# EAGLE board hermesONE v2.0 (EAGLE 9.4.2)
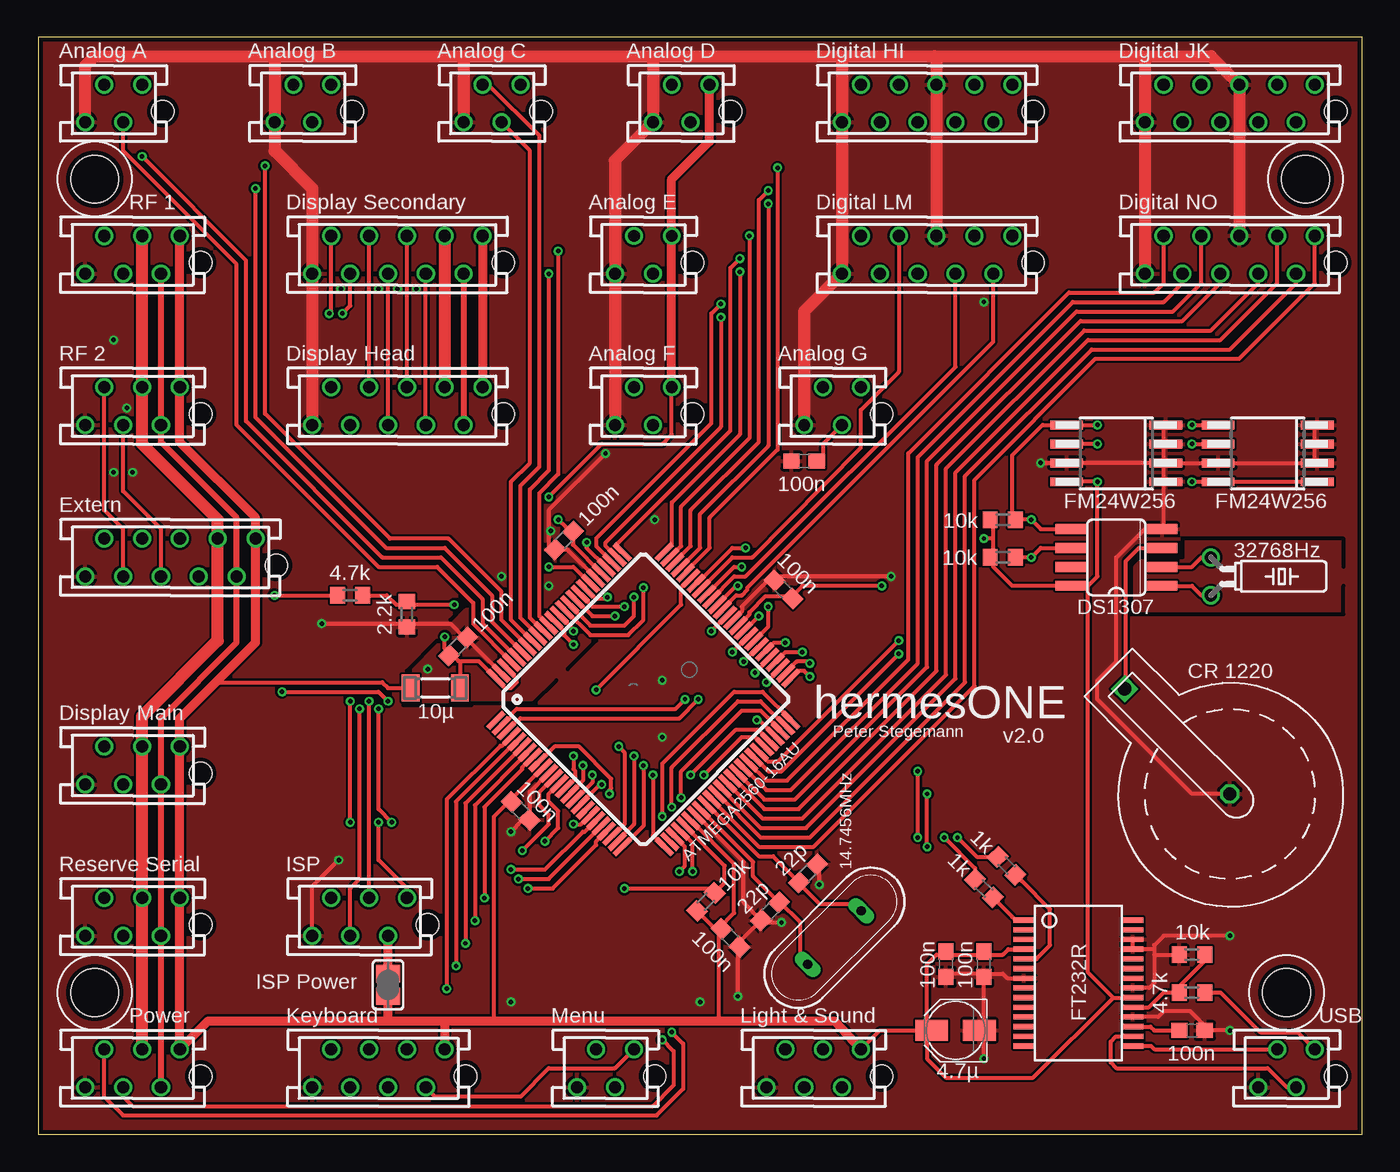
[diagram p0: board, top side]
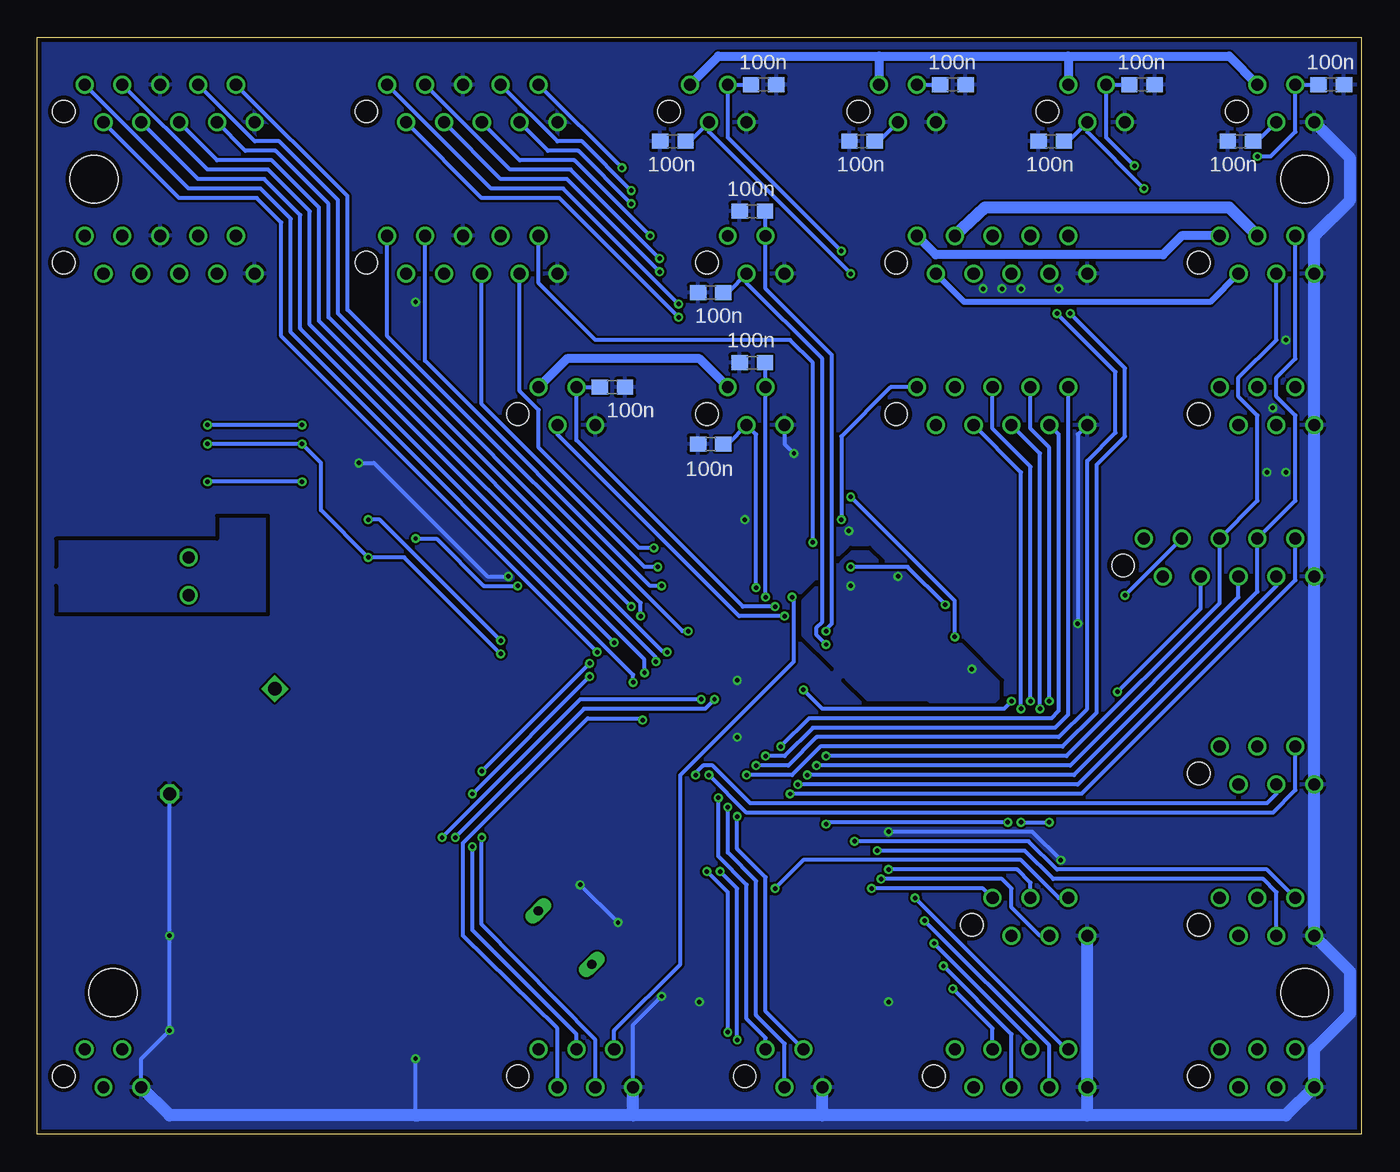
[diagram p1: board, bottom side, seen from below]

Size 88.9 x 73.66 mm. Coordinates in mm from the lower left corner, seen from the top.
Outline: 0,0 88.9,0 88.9,73.66 0,73.66 0,0
Copper layers (1*16): Top 0.035mm / dielectric 1.5mm / Bottom 0.035mm
Design rules "PCB-POOL Standard *": minimum track width 0.15mm, minimum drill 0.3mm, track to track 0.15mm, track to pad 0.15mm, pad to pad 0.15mm, via to via 0.15mm, smd to smd 0.15mm, copper to edge 0.3mm, drill to drill 0.2mm, minimum pad ring 0.2mm, minimum via ring 0.15mm, stop-mask expansion 0.075mm, vias tented up to drill 0mil, thermal gap 0.2mm
Net classes: 0 default: width 0.254 mm
Holes 3.2 mm at 83.82,9.53 3.81,9.53 3.81,64.14 85.09,64.14
tRestrict: 16 lines
bRestrict: 20 lines

## Footprints (pad centres in the part's own frame; a part is rotated, then mirrored left to right if it is on the bottom)
C0603 = smd 1.1 x 1: 1 -0.85,0; 2 0.85,0
PANASONIC_B = smd 2.2 x 1.4: + 1.6,0; - -1.6,0
KZH12THM = drill 0.9 square: + 9.982,0 | drill 0.9 octagon: - 0,0
TQFP100 = smd 1.5 x 0.35: 1 -8,6; 2 -8,5.5; 3 -8,5; 4 -8,4.5; 5 -8,4; 6 -8,3.5; 7 -8,3; 8 -8,2.5; 9 -8,2; 10 -8,1.5; 11 -8,1; 12 -8,0.5; 13 -8,0; 14 -8,-0.5; 15 -8,-1; 16 -8,-1.5; 17 -8,-2; 18 -8,-2.5; 19 -8,-3; 20 -8,-3.5; 21 -8,-4; 22 -8,-4.5; 23 -8,-5; 24 -8,-5.5; 25 -8,-6; 51 8,-6; 52 8,-5.5; 53 8,-5; 54 8,-4.5; 55 8,-4; 56 8,-3.5; 57 8,-3; 58 8,-2.5; 59 8,-2; 60 8,-1.5; 61 8,-1; 62 8,-0.5; 63 8,0; 64 8,0.5; 65 8,1; 66 8,1.5; 67 8,2; 68 8,2.5; 69 8,3; 70 8,3.5; 71 8,4; 72 8,4.5; 73 8,5; 74 8,5.5; 75 8,6 | smd 0.35 x 1.5: 26 -6,-8; 27 -5.5,-8; 28 -5,-8; 29 -4.5,-8; 30 -4,-8; 31 -3.5,-8; 32 -3,-8; 33 -2.5,-8; 34 -2,-8; 35 -1.5,-8; 36 -1,-8; 37 -0.5,-8; 38 0,-8; 39 0.5,-8; 40 1,-8; 41 1.5,-8; 42 2,-8; 43 2.5,-8; 44 3,-8; 45 3.5,-8; 46 4,-8; 47 4.5,-8; 48 5,-8; 49 5.5,-8; 50 6,-8; 76 6,8; 77 5.5,8; 78 5,8; 79 4.5,8; 80 4,8; 81 3.5,8; 82 3,8; 83 2.5,8; 84 2,8; 85 1.5,8; 86 1,8; 87 0.5,8; 88 0,8; 89 -0.5,8; 90 -1,8; 91 -1.5,8; 92 -2,8; 93 -2.5,8; 94 -3,8; 95 -3.5,8; 96 -4,8; 97 -4.5,8; 98 -5,8; 99 -5.5,8; 100 -6,8
SOIC-8 = smd 2.032 x 0.66: 1 -3.073,1.27; 2 -3.073,0; 3 -3.073,-1.27; 4 -3.073,-2.54; 5 3.073,-2.54; 6 3.073,-1.27; 7 3.073,0; 8 3.073,1.27
SO-08M = smd 0.6 x 2.2: 1 -1.905,-3.33; 2 -0.635,-3.33; 3 0.635,-3.33; 4 1.905,-3.33; 5 1.905,3.33; 6 0.635,3.33; 7 -0.635,3.33; 8 -1.905,3.33
SM-1206 = smd 1.2 x 1.8: 1 -1.65,0; 2 1.65,0
MT-4 = drill 0.8: 1 1.905,1.27; 2 0.635,-1.27; 3 -0.635,1.27; 4 -1.905,-1.27 | hole 1.5: 3.302,-0.533
MT-10 = drill 0.813: 1 5.715,1.27; 2 4.445,-1.27; 3 3.175,1.27; 4 1.905,-1.27; 5 0.635,1.27; 6 -0.635,-1.27; 7 -1.905,1.27; 8 -3.175,-1.27; 9 -4.445,1.27; 10 -5.715,-1.27 | hole 1.5: 7.112,-0.533
MT-6 = drill 0.813: 1 3.175,1.27; 2 1.905,-1.27; 3 0.635,1.27; 4 -0.635,-1.27; 5 -1.905,1.27; 6 -3.175,-1.27 | hole 1.5: 4.572,-0.533
MT-8 = drill 0.813: 1 4.445,1.27; 2 3.175,-1.27; 3 1.905,1.27; 4 0.635,-1.27; 5 -0.635,1.27; 6 -1.905,-1.27; 7 -3.175,1.27; 8 -4.445,-1.27 | hole 1.5: 5.842,-0.533
QS = drill 0.61 long: 1 -2.54,0; 2 2.54,0
TC26H = drill 0.813: 1 -1.27,0; 2 1.27,0
R0603 = smd 1 x 1.1: 1 -0.85,0; 2 0.85,0
SJ = smd 1.168 x 1.6: 1 -0.762,0; 2 0.762,0
SSOP28DB = smd 0.348 x 1.397: 1 -4.225,-3.656; 2 -3.575,-3.656; 3 -2.925,-3.656; 4 -2.275,-3.656; 5 -1.625,-3.656; 6 -0.975,-3.656; 7 -0.325,-3.656; 8 0.325,-3.656; 9 0.975,-3.656; 10 1.625,-3.656; 11 2.275,-3.656; 12 2.925,-3.656; 13 3.575,-3.656; 14 4.225,-3.656; 15 4.225,3.656; 16 3.575,3.656; 17 2.925,3.656; 18 2.275,3.656; 19 1.625,3.656; 20 0.975,3.656; 21 0.325,3.656; 22 -0.325,3.656; 23 -0.975,3.656; 24 -1.625,3.656; 25 -2.275,3.656; 26 -2.925,3.656; 27 -3.575,3.656; 28 -4.225,3.656

## Placement (x,y rotation side)
C1  22p  [C0603]  51.69,17.53 45 top
C2  22p  [C0603]  49.15,14.99 225 top
C3  100n  [C0603]  60.96,11.43 90 top
C4  100n  [C0603]  63.5,11.43 90 top
C5  100n  [C0603]  28.19,32.77 45 top
C6  100n  [C0603]  35.31,39.88 225 top
C7  100n  [C0603]  50.04,36.58 135 top
C8  100n  [C0603]  46.48,13.21 315 top
C9  100n  [C0603]  32.38,21.72 315 top
C10  100n  [C0603]  77.47,6.99 180 top
C11  4.7µ  [PANASONIC_B]  61.59,6.99 180 top
C12  100n  [C0603]  8.13,66.67 180 bottom
C13  100n  [C0603]  2.03,70.48 0 bottom
C14  100n  [C0603]  20.83,66.67 180 bottom
C15  100n  [C0603]  14.73,70.48 0 bottom
C16  100n  [C0603]  33.53,66.67 180 bottom
C17  100n  [C0603]  27.43,70.48 0 bottom
C18  100n  [C0603]  46.23,66.67 180 bottom
C19  100n  [C0603]  40.13,70.48 0 bottom
C20  100n  [C0603]  43.69,56.52 180 bottom
C21  100n  [C0603]  40.89,61.98 180 bottom
C22  100n  [C0603]  43.69,46.35 180 bottom
C23  100n  [C0603]  40.89,51.82 180 bottom
C24  100n  [C0603]  51.44,45.21 180 top
C25  100n  [C0603]  50.29,50.16 0 bottom
G1  CR 1220  [KZH12THM]  80.01,22.86 135 top
IC1  ATMEGA2560-16AU  [TQFP100]  40.64,29.21 45 top
IC3  DS1307  [SOIC-8]  72.39,38.1 180 top
IC4  FM24W256  [SO-08M]  72.39,45.72 90 top
IC5  FM24W256  [SO-08M]  82.55,45.72 90 top
L1  10µ  [SM-1206]  26.67,29.97 0 top
M1  Analog A  [MT-4]  5.08,69.22 0 top
M2  Analog B  [MT-4]  17.78,69.22 0 top
M3  Analog C  [MT-4]  30.48,69.22 0 top
M4  Analog D  [MT-4]  43.18,69.22 0 top
M5  Analog E  [MT-4]  40.64,59.05 0 top
M6  Analog F  [MT-4]  40.64,48.9 0 top
M7  Analog G  [MT-4]  53.34,48.9 0 top
M8  Digital HI  [MT-10]  59.69,69.22 0 top
M9  Digital JK  [MT-10]  80.01,69.22 0 top
M10  Digital LM  [MT-10]  59.69,59.05 0 top
M11  Digital NO  [MT-10]  80.01,59.05 0 top
M20  Power  [MT-6]  6.35,4.45 0 top
M21  ISP  [MT-6]  21.59,14.61 0 top
M23  USB  [MT-4]  83.82,4.45 0 top
M30  RF 1  [MT-6]  6.35,59.05 0 top
M31  RF 2  [MT-6]  6.35,48.9 0 top
M32  Extern  [MT-10]  8.89,38.73 0 top
M40  Display Head  [MT-10]  24.13,48.9 0 top
M41  Display Secondary  [MT-10]  24.13,59.05 0 top
M42  Display Main  [MT-6]  6.35,24.77 0 top
M43  Reserve Serial  [MT-6]  6.35,14.61 0 top
M50  Light & Sound  [MT-6]  52.07,4.45 0 top
M51  Menu  [MT-4]  38.1,4.45 0 top
M52  Keyboard  [MT-8]  22.86,4.45 0 top
Q1  14.7456MHz  [QS]  53.47,13.21 225 top
Q2  32768Hz  [TC26H]  78.74,37.47 270 top
R1  10k  [R0603]  44.83,15.62 45 top
R2  10k  [R0603]  64.77,38.73 0 top
R3  10k  [R0603]  64.77,41.27 0 top
R4  2.2k  [R0603]  24.77,34.92 270 top
R5  4.7k  [R0603]  20.95,36.2 180 top
R6  4.7k  [R0603]  77.47,9.53 180 top
R7  10k  [R0603]  77.47,12.06 180 top
R8  1k  [R0603]  63.5,16.51 135 top
R9  1k  [R0603]  65.02,18.03 135 top
SJ1  ISP Power  [SJ]  23.5,10.03 270 top
U1  FT232R  [SSOP28DB]  69.85,10.16 270 top

## Library data of the parts
C1-C25 R1-R9 = resistor
G1 = kzh12_lithium_batterie_holder
IC1 = atmel-2005
IC3 = dallas
IC4 IC5 = microchip; MF: RAMTRON INTERNATIONAL CORP; MPN: FM24C64-S; OC_FARNELL: 9882685; OC_NEWARK: 98H0189
L1 = inductor-neosid; OC_FARNELL: unknown; OC_NEWARK: unknown
M1-M7 M23 M51 = pst-con-amp-micromatch; MPN: 7-215079-4
M8-M11 M32 M40 M41 = pst-con-amp-micromatch; MF: FARNELL; MPN: 8-215079-0
M20 M21 M30 M31 M42 M43 M50 = pst-con-amp-micromatch; MPN: 7-215079-6
M52 = pst-con-amp-micromatch; MF: FARNELL; MPN: 7-215079-8
Q1 = special
Q2 = crystal; OC_FARNELL: unknown; OC_NEWARK: unknown
SJ1 = jumper
U1 = ftdichip-5

## Nets
3V3: M20.2 M30.2 M31.2 M32.2 M40.2 M41.2 M42.2 M43.2
3V3OUT: C10.2 U1.17
/RESET: IC1.30 M21.5 R1.2
ANALOG_A1: C12.1 IC1.97 M1.2
ANALOG_A2: C13.1 IC1.96 M1.3
ANALOG_B1: C14.1 IC1.95 M2.2
ANALOG_B2: C15.1 IC1.94 M2.3
ANALOG_C1: C16.1 IC1.93 M3.2
ANALOG_C2: C17.1 IC1.92 M3.3
ANALOG_D1: C18.1 IC1.91 M4.2
ANALOG_D2: C19.1 IC1.90 M4.3
ANALOG_E1: C20.1 IC1.89 M5.2
ANALOG_E2: C21.1 IC1.88 M5.3
ANALOG_F1: C22.1 IC1.87 M6.2
ANALOG_F2: C23.1 IC1.86 M6.3
ANALOG_G1: C24.1 IC1.85 M7.2
ANALOG_G2: C25.1 IC1.84 M7.3
AVCC: C5.1 IC1.98 IC1.100 L1.2 M1.1 M2.1 M3.1 M4.1 M5.1 M6.1 M7.1
BATTERY: M20.3 M30.3 M31.3 M32.3 M40.3 M41.3 M42.3 M43.3 R5.2
BATTERY_CONTROL: IC1.82 R4.1 R5.1
BUZZER: IC1.47 M50.2
D+: M23.3 U1.15
D-: M23.2 U1.16
DIGITAL_H1: IC1.78 M8.1
DIGITAL_H2: IC1.77 M8.2
DIGITAL_H3: IC1.76 M8.3
DIGITAL_H4: IC1.75 M8.4
DIGITAL_I1: IC1.74 M8.6
DIGITAL_I2: IC1.73 M8.7
DIGITAL_I3: IC1.72 M8.8
DIGITAL_I4: IC1.71 M8.9
DIGITAL_J1: IC1.53 M9.1
DIGITAL_J2: IC1.54 M9.2
DIGITAL_J3: IC1.55 M9.3
DIGITAL_J4: IC1.56 M9.4
DIGITAL_K1: IC1.57 M9.6
DIGITAL_K2: IC1.58 M9.7
DIGITAL_K3: IC1.59 M9.8
DIGITAL_K4: IC1.60 M9.9
DIGITAL_L1: IC1.63 M10.1
DIGITAL_L2: IC1.64 M10.2
DIGITAL_L3: IC1.65 M10.3
DIGITAL_L4: IC1.66 M10.4
DIGITAL_M1: IC1.67 M10.6
DIGITAL_M2: IC1.68 M10.7
DIGITAL_M3: IC1.69 M10.8
DIGITAL_M4: IC1.79 M10.9
DIGITAL_N1: IC1.35 M11.1
DIGITAL_N2: IC1.36 M11.2
DIGITAL_N3: IC1.37 M11.3
DIGITAL_N4: IC1.38 M11.4
DIGITAL_O1: IC1.39 M11.6
DIGITAL_O2: IC1.40 M11.7
DIGITAL_O3: IC1.41 M11.8
DIGITAL_O4: IC1.42 M11.9
DISPLAY_HEAD_LIGHT: IC1.24 M40.9
DISPLAY_HEAD_SELECT: IC1.23 M40.8
DISPLAY_RX: IC1.45 M42.4
DISPLAY_SECONDARY_LIGHT: IC1.26 M41.9
DISPLAY_SECONDARY_SELECT: IC1.25 M41.8
DISPLAY_TX: IC1.46 M42.5
GND: C1.2 C2.2 C3.1 C4.1 C5.2 C6.2 C7.2 C8.2 C9.2 C10.1 C11.- C12.2 C13.2 C14.2 C15.2 C16.2 C17.2 C18.2 C19.2 C20.2 C21.2 C22.2 C23.2 C24.2 C25.2 G1.- IC1.11 IC1.32 IC1.62 IC1.81 IC1.99 IC3.4 IC4.1 IC4.2 IC4.3 IC4.4 IC4.7 IC5.2 IC5.3 IC5.4 IC5.7 M1.4 M2.4 M3.4 M4.4 M5.4 M6.4 M7.4 M8.5 M8.10 M9.5 M9.10 M10.5 M10.10 M11.5 M11.10 M20.6 M21.6 M23.4 M30.6 M31.6 M32.10 M40.10 M41.10 M42.6 M43.6 M50.6 M51.4 M52.8 R4.2 R7.2 U1.7 U1.18 U1.21 U1.25 U1.26
ISP_VCC: M21.2 SJ1.1
KEYBOARD_0: IC1.4 M52.3
KEYBOARD_1: IC1.5 M52.4
KEYBOARD_2: IC1.6 M52.5
KEYBOARD_3: IC1.7 M52.6
KEYBOARD_4: IC1.8 M52.7
LED_GREEN: IC1.52 M50.4
LED_RED: IC1.51 M50.3
LIGHT_SENSOR: IC1.83 M50.5
MENU_BUTTON: IC1.48 M51.1 M52.2
MENU_ROTARY_A: IC1.49 M51.2
MENU_ROTARY_B: IC1.50 M51.3
MISO/SPI_RESET: IC1.22 M21.1 M40.7 M41.7
MOSI/SPI_DATA: IC1.21 M21.4 M40.6 M41.6
POWER_BUTTON: IC1.28 M20.4
POWER_ON: IC1.29 M20.5
PPM_INPUT: IC1.9 M32.9
PPM_OUTPUT_1: IC1.16 M30.5 M32.7
PPM_OUTPUT_2: IC1.17 M31.5 M32.8
RESERVE_RX: IC1.12 M43.4
RESERVE_TX: IC1.13 M43.5
RF_ENABLE_1: IC1.14 M30.4 M32.5
RF_ENABLE_2: IC1.15 M31.4 M32.6
RXD: R9.1 U1.5
SCK/SPI_CLOCK: IC1.20 M21.3 M40.5 M41.5
SPI_DC: IC1.19 M40.4 M41.4
TRAINER_ACTIVE: IC1.70 M32.4
TWI_SCL: IC1.43 IC3.6 IC4.6 IC5.6 R2.2
TWI_SDA: IC1.44 IC3.5 IC4.5 IC5.5 R3.2
TXD: R8.1 U1.1
USB_RESET: R6.2 R7.1 U1.19
USB_RX: IC1.2 R8.2
USB_TX: IC1.3 R9.2
USB_VCC: M23.1 R6.1
VBAT: G1.+ IC3.3
VCC: C3.2 C4.2 C6.1 C7.1 C8.1 C9.1 C11.+ IC1.10 IC1.31 IC1.61 IC1.80 IC3.8 IC4.8 IC5.1 IC5.8 L1.1 M20.1 M30.1 M31.1 M32.1 M40.1 M41.1 M42.1 M43.1 M50.1 M52.1 R1.1 R2.1 R3.1 SJ1.2 U1.4 U1.20
X1: IC3.1 Q2.2
X2: IC3.2 Q2.1
XTAL1: C1.1 IC1.34 Q1.1
XTAL2: C2.1 IC1.33 Q1.2

## Tracks (layer width: path | path; a pad name or v marks a point on that pad's centre or on a via)
3V3
  Top 0.406: M20.2 M43.2 M42.2 8.26,27.94 13.34,33.02 M32.2 13.34,41.4 8.26,46.48 M31.2 M30.2 | M41.2 M40.2
  Bottom 0.406: M41.2 26.67,55.88 10.16,55.88 M30.2
3V3OUT
  Top 0.254: C10.2 74.93,6.99 74.68,7.24 U1.17
/RESET  (via drill 0.3)
  Top 0.254: IC1.30 43.47,20.67 46.1,18.03 46.1,16.89 R1.2 45.14,16.51 v39.37,16.51
  Bottom 0.254: M21.5 20.32,15.88 22.86,18.41 37.47,18.41 v39.37,16.51
ANALOG_A1
  Top 0.254: IC1.97 31.8,31.7 29.21,34.29 29.21,35.69 26.8,38.1 22.86,38.1 13.34,47.62 13.34,58.42 5.71,66.04 M1.2
  Bottom 0.254: M1.2 6.99,66.67 C12.1
ANALOG_A2  (via drill 0.3)
  Top 0.254: IC1.96 32.1,32.04 29.84,34.29 29.84,35.94 27.05,38.73 23.11,38.73 13.97,47.88 13.97,58.67 v6.99,65.66
  Bottom 0.254: v6.99,65.66 6.1,65.66 4.45,67.31 M1.3 C13.1
ANALOG_B1  (via drill 0.3)
  Top 0.254: IC1.95 30.48,34.42 30.48,36.2 27.3,39.37 23.37,39.37 14.61,48.13 v14.61,63.5
  Bottom 0.254: v14.61,63.5 18.41,67.31 M2.2 19.68,66.67 C14.1
ANALOG_B2  (via drill 0.3)
  Top 0.254: IC1.94 32.73,32.92 31.11,34.54 31.11,36.45 27.56,40.01 23.62,40.01 15.24,48.39 v15.24,65.02
  Bottom 0.254: v15.24,65.02 17.14,66.93 M2.3 C15.1
ANALOG_C1
  Top 0.254: IC1.93 33.2,33.1 31.75,34.54 31.75,43.81 33.02,45.09 33.02,66.04 M3.2
  Bottom 0.254: M3.2 32.38,66.67 C16.1
ANALOG_C2
  Top 0.254: IC1.92 33.57,33.49 32.38,34.67 32.38,43.56 33.66,44.83 33.66,67.06 30.23,70.48 M3.3
  Bottom 0.254: M3.3 C17.1
ANALOG_D1  (via drill 0.3)
  Top 0.254: IC1.91 33.92,33.77 33.02,34.67 33.02,43.31 34.29,44.58 v34.29,57.78
  Bottom 0.254: v34.29,57.78 43.81,67.31 M4.2 45.09,66.67 C18.1
ANALOG_D2  (via drill 0.3)
  Top 0.254: IC1.90 34.16,34.27 34.16,34.29 33.66,34.8 33.66,43.05 34.92,44.32 v34.92,59.31
  Bottom 0.254: v34.92,59.31 42.55,66.93 M4.3 C19.1
ANALOG_E1  (via drill 0.3)
  Top 0.254: IC1.89 34.7,34.39 35.31,33.78 35.31,33.53 v35.94,32.89
  Bottom 0.254: v35.94,32.89 36.58,33.53 36.58,34.04 36.2,34.42 36.2,52.07 41.27,57.15 M5.2 42.55,56.52 C20.1
ANALOG_E2  (via drill 0.3)
  Top 0.254: IC1.88 35.87,33.98 35.94,33.91 v35.94,33.78
  Bottom 0.254: v35.94,33.78 35.94,33.91 35.56,34.29 35.56,52.32 40.01,56.77 M5.3 40.01,61.94 C21.1
ANALOG_F1  (via drill 0.3)
  Top 0.254: IC1.87 35.46,35.15 37.08,33.53 39.62,33.53 40.64,34.54 v40.64,36.7
  Bottom 0.254: v40.64,36.7 40.64,46.99 M6.2 42.55,46.35 C22.1
ANALOG_F2  (via drill 0.3)
  Top 0.254: IC1.86 35.69,35.56 37.08,34.16 39.37,34.16 40.01,34.8 v40.01,36.07
  Bottom 0.254: v40.01,36.07 M6.3 40.01,51.78 C23.1
ANALOG_G1  (via drill 0.3)
  Top 0.254: IC1.85 36.08,35.93 37.21,34.8 v38.73,34.8 | M7.2 52.7,46.35 52.7,45.09 C24.1
  Bottom 0.254: M7.2 53.98,46.99 41.78,34.8 v38.73,34.8
ANALOG_G2  (via drill 0.3)
  Top 0.254: IC1.84 36.36,36.28 37.21,35.43 v39.37,35.43
  Bottom 0.254: v39.37,35.43 41.53,35.43 52.7,46.61 M7.3 C25.1
AVCC  (via drill 0.3)
  Top 0.254: L1.2 28.32,31.69 28.23,31.78 | 28.23,31.78 29.58,31.78 IC1.100 30.74,30.6 31.37,29.97 31.75,29.97 32.13,30.35 32.13,30.61 31.45,31.29 IC1.98 | 28.23,31.78 27.97,32.04 C5.1 27.59,32.35 27.3,32.64 v27.3,33.4 | v34.29,42.8 37.85,46.35 41.91,46.35 42.55,46.99 M6.1
  Top 0.61: M6.1 M5.1 42.55,64.14 45.09,66.67 M4.1
  Bottom 0.254: v27.3,33.4 27.3,35.81 v34.29,42.8
  Bottom 0.61: M1.1 8.89,72.39 19.68,72.39 | 32.38,72.39 19.68,72.39 | 32.38,72.39 43.18,72.39 M4.1 | 32.38,72.39 M3.1 | 19.68,72.39 M2.1 | M6.1 44.45,52.07 53.34,52.07 M7.1
BATTERY  (via drill 0.3)
  Top 0.254: v15.88,36.2 R5.2
  Top 0.813: M20.3 M43.3 M42.3 6.99,28.07 12.06,33.15 M32.3 12.06,41.27 6.99,46.35 M31.3 M30.3 | M41.3 M40.3
  Bottom 0.254: M32.3 v15.88,36.2
  Bottom 0.813: M30.3 8.89,62.23 25.27,62.23 M41.3
BATTERY_CONTROL  (via drill 0.3)
  Top 0.254: IC1.82 37.05,36.99 35.94,38.1 v34.29,38.1 | 24.55,35.56 v27.94,35.56 | R5.1 23.41,36.2 24.04,35.56 24.55,35.56 | 24.55,35.56 R4.1
  Bottom 0.254: v34.29,38.1 30.48,38.1 v27.94,35.56
BUZZER  (via drill 0.3)
  Top 0.254: IC1.47 49.48,26.72 48.39,27.81 v48.26,27.81
  Bottom 0.254: M50.2 53.98,7.11 60.33,13.34 60.33,19.56 51.94,27.94 48.39,27.94 v48.26,27.81
D+
  Top 0.254: M23.3 74.93,5.71 74.71,5.93 U1.15
D-
  Top 0.254: M23.2 83.82,3.17 82.55,4.45 72.39,4.45 72.01,4.83 72.01,6.22 72.37,6.58 U1.16
DIGITAL_H1  (via drill 0.3)
  Top 0.254: IC1.78 38.43,38.53 37.47,39.5 37.47,40.01 45.21,47.75 45.21,55.12 v45.85,55.75
  Bottom 0.254: M8.1 58.42,63.5 53.59,63.5 v45.85,55.75
DIGITAL_H2  (via drill 0.3)
  Top 0.254: IC1.77 38.84,38.76 38.1,39.5 38.1,39.75 45.85,47.5 v45.85,54.86
  Bottom 0.254: M8.2 59.05,62.87 53.85,62.87 v45.85,54.86
DIGITAL_H3  (via drill 0.3)
  Top 0.254: IC1.76 38.84,39.61 46.48,47.24 46.48,58.17 v47.12,58.8
  Bottom 0.254: v47.12,58.8 53.09,64.77 57.15,64.77 M8.3
DIGITAL_H4  (via drill 0.3)
  Top 0.254: IC1.75 42.05,39.13 42.56,39.64 42.56,42.44 47.12,46.99 v47.12,57.91
  Bottom 0.254: v47.12,57.91 53.34,64.14 57.78,64.14 M8.4
DIGITAL_I1  (via drill 0.3)
  Top 0.254: IC1.74 42.44,38.76 43.18,39.5 43.18,42.16 47.75,46.74 v47.75,60.33
  Bottom 0.254: v47.75,60.33 52.83,65.41 56.52,65.41 M8.6
DIGITAL_I2  (via drill 0.3)
  Top 0.254: IC1.73 42.76,38.44 43.81,39.5 43.81,41.91 48.39,46.48 48.39,62.74 v49.02,63.37
  Bottom 0.254: v49.02,63.37 52.32,66.67 53.98,66.67 M8.7
DIGITAL_I3  (via drill 0.3)
  Top 0.254: IC1.72 43.13,38.05 44.45,39.37 44.45,41.66 49.02,46.23 v49.02,62.48
  Bottom 0.254: v49.02,62.48 52.58,66.04 54.61,66.04 M8.8
DIGITAL_I4  (via drill 0.3)
  Top 0.254: IC1.71 43.54,37.82 45.09,39.37 45.09,41.4 49.66,45.97 v49.66,64.9
  Bottom 0.254: v49.66,64.9 M8.9
DIGITAL_J1  (via drill 0.3)
  Top 0.254: IC1.53 49.87,31.33 v48.9,30.35
  Bottom 0.254: M9.1 78.74,63.5 73.91,63.5 71.88,61.47 71.88,53.85 48.9,30.86 v48.9,30.35
DIGITAL_J2  (via drill 0.3)
  Top 0.254: IC1.54 49.48,31.7 50.16,32.38 v51.31,32.38
  Bottom 0.254: M9.2 79.38,62.87 74.17,62.87 72.52,61.21 72.52,53.59 v51.31,32.38
DIGITAL_J3  (via drill 0.3)
  Top 0.254: IC1.55 49.06,31.91 v48.13,30.99
  Bottom 0.254: M9.3 77.47,64.77 73.41,64.77 70.61,61.98 70.61,54.36 48.13,31.88 v48.13,30.99
DIGITAL_J4  (via drill 0.3)
  Top 0.254: IC1.56 49.4,33.02 v50.16,33.02
  Bottom 0.254: M9.4 78.11,64.14 73.66,64.14 71.25,61.72 71.25,54.1 v50.16,33.02
DIGITAL_K1  (via drill 0.3)
  Top 0.254: IC1.57 48.37,32.74 v47.37,31.75
  Bottom 0.254: M9.6 76.83,65.41 73.15,65.41 69.98,62.23 69.98,54.61 47.37,32 v47.37,31.75
DIGITAL_K2  (via drill 0.3)
  Top 0.254: v49.02,35.43 49.02,34.12 48.06,33.16 IC1.58
  Bottom 0.254: M9.7 74.3,66.67 72.64,66.67 68.71,62.74 68.71,55.12 v49.02,35.43
DIGITAL_K3  (via drill 0.3)
  Top 0.254: IC1.59 47.68,33.45 v46.61,32.38
  Bottom 0.254: M9.8 74.93,66.04 72.9,66.04 69.34,62.48 69.34,54.86 46.91,32.44 46.66,32.44 v46.61,32.38
DIGITAL_K4  (via drill 0.3)
  Top 0.254: IC1.60 47.4,33.81 v48.39,34.8
  Bottom 0.254: v48.39,34.8 48.39,35.69 68.07,55.37 68.07,62.99 M9.9
DIGITAL_L1  (via drill 0.3)
  Top 0.254: v45.21,33.78 IC1.63
  Bottom 0.254: M10.1 65.41,53.59 45.59,33.78 v45.21,33.78
DIGITAL_L2
  Top 0.254: M10.2 64.14,53.21 47.62,36.7 47.62,36.58 47.24,36.2 46.86,36.2 45.89,35.22 IC1.64
DIGITAL_L3  (via drill 0.3)
  Top 0.254: IC1.65 45.61,35.57 46.86,36.83 v46.99,36.83
  Bottom 0.254: M10.3 62.87,51.94 47.75,36.83 v46.99,36.83
DIGITAL_L4
  Top 0.254: M10.4 61.59,51.52 47.5,37.47 46.74,37.47 45.2,35.93 IC1.66
DIGITAL_M1  (via drill 0.3)
  Top 0.254: IC1.67 44.92,36.28 46.74,38.1 v47.24,38.1
  Bottom 0.254: M10.6 59.05,49.02 48.13,38.1 v47.24,38.1
DIGITAL_M2
  Top 0.254: IC1.68 44.53,36.66 46.61,38.73 47.96,38.73 55.24,46.1 55.24,48.64 57.78,51.18 M10.7
DIGITAL_M3  (via drill 0.3)
  Top 0.254: IC1.69 44.23,36.99 46.61,39.37 v47.5,39.37
  Bottom 0.254: M10.8 56.52,49.91 55.24,48.64 55.24,46.1 48.51,39.37 v47.5,39.37
DIGITAL_M4  (via drill 0.3)
  Top 0.254: IC1.79 38.15,38.05 36.83,39.37 v36.83,39.75
  Bottom 0.254: M10.9 55.24,57.15 51.44,53.34 38.35,53.34 36.83,51.82 v36.83,39.75
DIGITAL_N1
  Top 0.254: M11.1 85.72,57.15 80.64,52.07 70.99,52.07 62.87,43.94 62.87,30.1 52.07,19.3 48.39,19.3 45.24,22.45 IC1.35
DIGITAL_N2
  Top 0.254: M11.2 84.45,57.15 80.01,52.7 70.74,52.7 62.23,44.2 62.23,30.35 51.82,19.94 48.51,19.94 45.61,22.85 IC1.36
DIGITAL_N3
  Top 0.254: M11.3 83.19,57.15 79.38,53.34 70.48,53.34 61.59,44.45 61.59,30.61 51.56,20.57 48.51,20.57 45.94,23.14 IC1.37
DIGITAL_N4
  Top 0.254: M11.4 81.92,57.15 78.74,53.98 70.23,53.98 60.96,44.7 60.96,30.86 51.31,21.21 48.64,21.21 IC1.38
DIGITAL_O1
  Top 0.254: M11.6 79.38,57.15 76.83,54.61 69.98,54.61 60.33,44.96 60.33,31.11 51.05,21.84 48.77,21.84 46.78,23.84 IC1.39
DIGITAL_O2
  Top 0.254: M11.7 78.11,57.15 76.2,55.24 69.72,55.24 59.69,45.21 59.69,31.37 50.8,22.48 48.77,22.48 47,24.24 IC1.40
DIGITAL_O3
  Top 0.254: M11.8 76.83,57.15 75.56,55.88 69.47,55.88 59.05,45.47 59.05,31.62 50.55,23.11 48.9,23.11 47.4,24.61 IC1.41
DIGITAL_O4
  Top 0.254: M11.9 75.56,57.15 74.93,56.52 69.22,56.52 58.42,45.72 58.42,31.88 50.29,23.75 48.9,23.75 47.71,24.93 IC1.42
DISPLAY_HEAD_LIGHT  (via drill 0.3)
  Top 0.254: IC1.24 38.87,19.7 40.01,20.83 v40.01,25.4
  Bottom 0.254: v40.01,25.4 38.73,25.4 36.83,27.3 20.57,27.3 19.68,28.19 M40.9
DISPLAY_HEAD_SELECT  (via drill 0.3)
  Top 0.254: IC1.23 38.65,20.1 39.37,20.83 39.37,25.65 v38.99,26.04
  Bottom 0.254: v38.99,26.04 37.08,27.94 20.83,27.94 20.32,28.45 20.32,46.99 M40.8
DISPLAY_RX  (via drill 0.3)
  Top 0.254: v44.7,24.13 47.24,26.67 48.13,26.67 IC1.45
  Bottom 0.254: M42.4 5.71,22.86 6.35,22.23 41.02,22.23 43.56,24.77 44.2,24.77 44.7,24.26 v44.7,24.13
DISPLAY_SECONDARY_LIGHT  (via drill 0.3)
  Top 0.254: IC1.26 42.03,19.31 41.27,20.07 v41.27,24.13 | v19.56,55.12 19.68,55.24 M41.9
  Bottom 0.254: v41.27,24.13 38.23,24.13 36.32,26.04 20.07,26.04 17.78,28.32 17.78,44.96 15.88,46.86 15.88,51.44 v19.56,55.12
DISPLAY_SECONDARY_SELECT  (via drill 0.3)
  Top 0.254: IC1.25 39.25,19.31 40.64,20.7 v40.64,24.77 | v20.45,55.12 20.95,55.63 M41.8
  Bottom 0.254: v40.64,24.77 38.48,24.77 36.58,26.67 20.32,26.67 18.41,28.57 18.41,45.21 16.51,47.12 16.51,51.18 v20.45,55.12
DISPLAY_TX  (via drill 0.3)
  Top 0.254: v43.81,24.13 46.86,27.18 48.33,27.18 IC1.46
  Bottom 0.254: M42.5 4.45,23.11 5.97,21.59 41.27,21.59 v43.81,24.13
GND  (via drill 0.3)
  Top 0.254: U1.26 U1.25 74.92,12.44 74.93,12.45 | C4.1 63.92,10.79 64.77,10.79 65.08,10.48 U1.7 | C4.1 63.28,10.79 61.17,10.79 C3.1 | C4.1 63.5,7.29 C11.- 63.2,6.66 63.5,6.35 v63.5,5.08 | 85.72,46.35 85.72,45.24 IC5.2 IC5.7 IC4.2 75.56,45.09 | 85.72,46.35 85.72,47.47 IC5.4 | 85.72,46.35 IC5.3 | 75.56,45.09 75.56,43.97 IC4.1 75.56,43.66 75.56,40.74 IC3.4 74.3,40.64 72.39,38.73 72.39,31.75 71.12,30.48 71.12,29.21 77.47,22.86 G1.- | 75.56,45.09 75.56,46.35 | 75.56,46.35 75.56,47.47 IC4.4 | 75.56,46.35 IC4.3 | 75.56,45.09 v67.31,45.09 IC4.7 | U1.18 75.19,7.88 75.56,8.26 77.34,8.26 78.32,7.28 C10.1 v80.01,6.99 | 74.93,12.06 R7.2 | 74.93,12.06 74.93,10.16 74.61,9.84 U1.21 | v80.01,13.34 75.56,13.34 74.93,12.7 74.93,12.45 | 74.93,12.45 74.93,12.06 | IC1.32 44.23,21.43 47.37,18.29 47.37,15.56 C2.2 | IC1.81 35.52,39.28 C6.2 34.29,39.5 34.29,41.91 v38.1,45.72 | IC1.99 28.8,33.28 C5.2 28.61,33.37 27.69,34.29 24.38,34.29 | IC1.11 33.02,23 33.02,21.59 32.93,21.5 C9.2 32.95,21.09 32.51,21.08 v31.75,20.32 | IC1.62 47.24,35.11 47.24,35.43 48.93,37.12 C7.2 49.73,37.47 v57.28,37.47 | C2.2 47.08,12.92 C8.2 46.99,12.57 v46.99,9.27 | v49.91,14.22 48.71,14.22 C2.2 | v52.45,16.76 52.45,17.97 C1.2 | R4.2 24.68,34.33 24.38,34.29 | M21.6 18.41,16.64 v20.19,18.41 | v19.05,34.29 24.38,34.29
  Top 0.813: M40.10 M41.10 18.41,63.5 15.88,66.04 M2.4 15.88,72.39 | M1.4 3.17,71.75 3.81,72.39 15.88,72.39 | 15.88,72.39 28.7,72.39 | 28.7,72.39 41.15,72.39 | 41.15,72.39 53.85,72.39 | 53.85,72.39 60.2,72.39 | 60.2,72.39 74.04,72.39 | 74.04,72.39 78.74,72.39 M9.5 M11.5 | 60.2,72.39 60.33,72.26 M8.5 M10.5 | M3.4 28.57,72.26 28.7,72.39 | 41.15,72.39 41.27,72.26 M4.4 38.73,65.41 M5.4 M6.4 | 53.85,72.39 53.98,72.26 M8.10 M10.10 51.44,55.24 M7.4 | 74.04,72.39 74.3,72.14 M9.10 M11.10
  Bottom 0.254: M23.4 81.92,5.08 v80.01,6.99 v80.01,13.34 G1.- | v63.5,5.08 63.5,1.27 63.37,1.27 | v49.91,14.22 v52.45,16.76 | M50.6 48.9,7.37 v46.99,9.27 | v57.28,37.47 58.67,37.47 66.29,45.09 v67.31,45.09 | v20.19,18.41 22.1,20.32 v31.75,20.32 | M6.4 38.73,46.35 v38.1,45.72 | v19.05,34.29 19.05,46.99 M40.10
  Bottom 0.813: M1.4 0.76,65.53 0.76,62.74 3.17,60.33 M30.6 M31.6 M32.10 M42.6 M43.6 0.76,10.92 0.76,8.13 3.17,5.71 M20.6 5.08,1.27 18.41,1.27 | 18.41,1.27 M52.8 M21.6 | 18.41,1.27 36.2,1.27 | 36.2,1.27 M51.4 | 36.2,1.27 48.9,1.27 | 48.9,1.27 M50.6 | M23.4 80.01,1.27 63.5,1.27 | 48.9,1.27 63.37,1.27
  other vias: 34.29,36.83 41.4,41.27 41.91,30.48 6.35,44.45 5.08,44.45 5.08,53.34 5.97,48.77 44.45,8.89 31.75,8.89 20.32,56.77 22.86,56.77 24.13,56.77 25.4,56.77 63.5,55.88 41.91,26.67 34.42,40.51 26.16,31.24 31.11,37.47
  pour Top: 0,0 88.9,0 88.9,73.66 0,73.66
  pour Bottom: 0,73.66 0,0 88.9,0 88.9,73.66
ISP_VCC
  Top 0.61: SJ1.1 M21.2
KEYBOARD_0  (via drill 0.3)
  Top 0.254: IC1.4 31.75,26.67 31.17,26.09 31.04,26.09 27.43,22.48 v27.43,9.78
  Bottom 0.254: M52.3 24.77,7.11 v27.43,9.78
KEYBOARD_1  (via drill 0.3)
  Top 0.254: IC1.5 32.1,26.38 28.07,22.35 v28.07,11.3
  Bottom 0.254: M52.4 23.5,6.73 v28.07,11.3
KEYBOARD_2  (via drill 0.3)
  Top 0.254: IC1.6 28.7,22.23 v28.7,12.83
  Bottom 0.254: M52.5 22.23,6.35 v28.7,12.83
KEYBOARD_3  (via drill 0.3)
  Top 0.254: IC1.7 32.91,25.67 29.34,22.1 v29.34,14.35
  Bottom 0.254: M52.6 20.95,5.97 v29.34,14.35
KEYBOARD_4  (via drill 0.3)
  Top 0.254: IC1.8 33.07,25.19 32.51,24.64 32.51,24.51 29.97,21.97 v29.97,15.88
  Bottom 0.254: v29.97,15.88 19.81,5.71 M52.7
LED_GREEN  (via drill 0.3)
  Top 0.254: v59.05,19.94 v59.05,24.38 | IC1.52 50.19,31.01 50.93,31.75 51.69,31.75 v51.82,31.62
  Bottom 0.254: M50.4 51.44,6.35 59.05,14.1 v59.05,19.94 | v59.05,24.38 v51.82,31.62
LED_RED  (via drill 0.3)
  Top 0.254: v59.69,19.3 v59.69,22.86 | IC1.51 50.56,30.62 51.05,31.11 51.44,31.11 v51.82,30.73
  Bottom 0.254: M50.3 52.7,6.73 59.69,13.72 v59.69,19.3 | v59.69,22.86 v51.82,30.73
LIGHT_SENSOR  (via drill 0.3)
  Top 0.254: IC1.83 36.77,36.63 37.47,35.94 38.1,35.94 v38.23,36.07
  Bottom 0.254: M50.5 50.16,6.99 45.72,11.43 45.72,24.13 38.1,31.75 38.1,35.94 v38.23,36.07
MENU_BUTTON  (via drill 0.3)
  Top 0.254: M52.2 26.67,2.54 32.38,2.54 34.29,4.45 38.73,4.45 M51.1 | IC1.48 49.83,27.13 48.51,28.45 47.24,28.45 43.18,24.38 v43.18,22.61
  Bottom 0.254: v43.18,22.61 43.18,18.67 41.27,16.76 41.27,7.75 40.01,6.48 M51.1
MENU_ROTARY_A  (via drill 0.3)
  Top 0.254: IC1.49 50.16,27.44 48.51,29.08 46.99,29.08 42.55,24.64 v42.55,21.97
  Bottom 0.254: M51.2 38.73,6.1 40.64,8 40.64,17.02 42.55,18.92 v42.55,21.97
MENU_ROTARY_B  (via drill 0.3)
  Top 0.254: IC1.50 50.54,27.82 48.64,29.72 46.74,29.72 41.91,24.89 v41.91,21.34
  Bottom 0.254: v41.91,21.34 41.91,19.18 40.01,17.27 40.01,8.26 M51.3
MISO/SPI_RESET  (via drill 0.3)
  Top 0.254: M40.7 M41.7 | M21.1 24.77,16.51 22.86,18.41 v22.86,20.95 | IC1.22 38.15,20.37 37.47,19.68 37.47,19.43 34.54,16.51 v32.89,16.51 | v20.95,20.95 v20.95,29.08
  Bottom 0.254: M21.1 25.4,16.51 v32.89,16.51 | v20.95,29.08 20.95,46.1 22.23,47.37 M40.7 | v22.86,20.95 v20.95,20.95
MOSI/SPI_DATA  (via drill 0.3)
  Top 0.254: M40.6 M41.6 | M21.4 20.95,16.51 21.59,17.14 v21.59,28.57 | IC1.21 37.81,20.67 34.29,17.14 v32.26,17.14
  Bottom 0.254: M21.4 21.59,13.34 23.5,15.24 23.5,16.51 24.13,17.14 v32.26,17.14 | M40.6 21.59,45.72 v21.59,28.57
POWER_BUTTON  (via drill 0.3)
  Top 0.254: M20.4 5.71,2.54 6.35,1.91 41.27,1.91 42.67,3.3 42.67,5.59 v41.91,6.35 | IC1.28 42.76,19.98 43.43,19.3 43.43,18.03 v43.05,17.65
  Bottom 0.254: v41.91,6.35 41.91,16.51 v43.05,17.65
POWER_ON  (via drill 0.3)
  Top 0.254: IC1.29 43.13,20.37 43.94,19.56 v43.94,17.65 | M20.5 4.45,2.54 5.71,1.27 41.53,1.27 43.31,3.05 43.31,6.1 v42.55,6.86
  Bottom 0.254: v42.55,6.86 42.55,16.26 v43.94,17.65
PPM_INPUT  (via drill 0.3)
  Top 0.254: IC1.9 33.6,24.97 34.67,26.04 36.32,26.04 38.48,23.88 38.48,23.24 38.35,23.11 v38.35,22.86
  Bottom 0.254: M32.9 4.45,37.21 18.8,22.86 v38.35,22.86
PPM_OUTPUT_1  (via drill 0.3)
  Top 0.254: IC1.16 36.46,22.87 37.21,23.62 v37.21,24.13
  Bottom 0.254: v37.21,24.13 19.3,24.13 6.99,36.45 M32.7 4.45,42.55 4.45,48.26 5.71,49.53 5.71,50.8 4.45,52.07 M30.5
PPM_OUTPUT_2  (via drill 0.3)
  Top 0.254: IC1.17 36.4,22.17 37.72,23.5 v37.85,23.5 | M32.8 5.71,40.64 4.45,41.91 M31.5
  Bottom 0.254: M32.8 5.71,36.83 19.05,23.5 v37.85,23.5
RESERVE_RX  (via drill 0.3)
  Top 0.254: IC1.12 34.58,23.91 33.66,22.99 33.66,22.1 34.29,21.46 34.29,20.83 v32.51,19.05
  Bottom 0.254: M43.4 5.71,16.26 6.6,17.14 20.7,17.14 22.61,19.05 v32.51,19.05
RESERVE_TX  (via drill 0.3)
  Top 0.254: IC1.13 34.29,22.86 34.29,22.35 34.92,21.72 34.92,20.57 v34.04,19.68
  Bottom 0.254: M43.5 6.35,17.78 20.45,17.78 22.35,19.68 v34.04,19.68
RF_ENABLE_1  (via drill 0.3)
  Top 0.254: IC1.14 35.34,23.14 36.07,23.88 36.07,24.38 35.94,24.51 v35.94,25.4
  Bottom 0.254: v35.94,25.4 19.81,25.4 9.53,35.69 M32.5 6.99,42.55 6.99,48.26 8.26,49.53 8.26,50.8 5.71,53.34 M30.4
RF_ENABLE_2  (via drill 0.3)
  Top 0.254: IC1.15 35.69,22.86 36.58,23.75 v36.58,24.77 | M32.6 8.26,40.64 5.71,43.18 M31.4
  Bottom 0.254: M32.6 8.26,36.07 19.56,24.77 v36.58,24.77
RXD
  Top 0.254: R9.1 66.04,17.02 67.94,15.11 67.94,12.7 67.03,11.79 U1.5
SCK/SPI_CLOCK  (via drill 0.3)
  Top 0.254: M40.5 M41.5 | M21.3 v22.23,29.08 | IC1.20 37.33,20.95 36.7,20.32 36.58,20.32 34.04,17.78 v31.75,17.78
  Bottom 0.254: v31.75,17.78 23.11,17.78 22.23,16.89 M21.3 | M40.5 24.77,47.37 22.23,44.83 v22.23,29.08
SPI_DC  (via drill 0.3)
  Top 0.254: M40.4 M41.4 | IC1.19 37.05,21.43 36.45,20.83 v35.94,20.83 | v23.75,20.95 22.86,21.84 v22.86,28.57
  Bottom 0.254: v35.94,20.83 35.81,20.95 v23.75,20.95 | v22.86,28.57 22.86,44.45 M40.4
TRAINER_ACTIVE  (via drill 0.3)
  Top 0.254: IC1.70 43.69,37.22 43.18,36.7 43.18,35.56 v37.47,29.84 | v23.5,29.08 22.86,29.72 v16.38,29.72
  Bottom 0.254: v37.47,29.84 36.2,28.57 24,28.57 v23.5,29.08 | v16.38,29.72 10.79,35.31 M32.4
TWI_SCL  (via drill 0.3)
  Top 0.254: v77.47,46.35 IC5.6 | v71.12,46.35 IC4.6 | R2.2 v66.67,38.73 67.31,39.37 IC3.6 | IC1.43 48.09,25.32 49.02,24.38 49.91,24.38 v57.78,32.26
  Bottom 0.254: v77.47,46.35 v71.12,46.35 69.85,45.09 69.85,41.91 v66.67,38.73 64.26,38.73 v57.78,32.26
TWI_SDA  (via drill 0.3)
  Top 0.254: v77.47,47.62 IC5.5 | v71.12,47.62 IC4.5 67.44,47.62 65.41,45.59 65.41,41.57 R3.2 v66.67,41.27 67.31,40.64 IC3.5 | IC1.44 48.37,25.67 49.02,25.02 49.66,25.02 v57.78,33.15
  Bottom 0.254: v71.12,47.62 v77.47,47.62 | v57.78,33.15 65.91,41.27 v66.67,41.27
TXD
  Top 0.254: U1.1 65.62,14.38 65.41,14.61 R8.1
USB_RESET
  Top 0.254: U1.19 74.58,8.54 75.56,9.53 R6.2 76.62,9.95 78.32,11.64 R7.1
USB_RX  (via drill 0.3)
  Top 0.254: v43.43,29.21 42.8,28.57 32.13,28.57 31.75,28.19 31.75,28.07 31.12,27.44 IC1.2 | R8.2 62.9,17.87 v60.83,19.94
  Bottom 0.254: v43.43,29.21 44.07,28.57 52.2,28.57 v60.83,19.94
USB_TX  (via drill 0.3)
  Top 0.254: v44.32,29.21 43.05,27.94 32.38,27.94 32.21,27.77 32.12,27.77 IC1.3 | R9.2 63.03,18.64 v61.72,19.94
  Bottom 0.254: v44.32,29.21 52.45,29.21 v61.72,19.94
USB_VCC
  Top 0.254: R6.1 79.38,9.53 82.04,6.86 84.58,6.86 M23.1
VBAT
  Top 0.254: G1.+ 73.03,29.99 73.03,38.48 73.91,39.37 IC3.3
VCC  (via drill 0.3)
  Top 0.254: 61.17,12.06 63.28,12.06 C4.2 63.72,12.06 64.77,12.06 65.14,12.44 U1.4 | 61.17,12.06 C3.2 | 61.17,12.06 60.33,12.06 59.69,11.43 59.69,7.29 | 59.69,7.29 59.69,5.08 60.96,3.81 66.8,3.81 72.18,9.19 | 59.69,7.29 C11.+ 56.52,6.99 M50.1 | IC5.1 IC5.8 v77.47,43.81 | R3.1 64.14,41.06 64.14,40.01 | 64.14,40.01 64.14,38.82 R2.1 64.14,38.39 64.14,38.1 65.41,36.83 IC3.8 70.48,36.83 | IC4.8 v71.12,43.81 71.12,37.47 70.48,36.83 | 72.18,9.19 U1.20 | IC1.31 46.74,18.16 46.74,14.86 45.75,13.88 | 45.75,13.88 C8.1 45.72,13.65 45.72,7.62 | IC1.10 33.88,24.61 31.59,22.32 C9.1 | IC1.80 35.91,39.6 C6.1 35.43,40.77 v34.92,41.27 | IC1.61 47.75,34.91 47.75,35.05 48.8,36.1 50.51,36.1 C7.1 50.64,36.16 51.3,36.83 52.07,36.83 v56.64,36.83 | 72.18,9.19 70.48,10.88 70.48,36.83 | 45.75,13.88 45.37,13.88 R1.1 | L1.1 23.5,29.97 23.11,30.35 11.94,30.35 14.61,33.02 | 64.14,40.01 v63.5,40.01 | 30.61,7.62 30.61,21.34 31.37,22.1 31.56,22.1 C9.1 | C9.1
  Top 0.61: M30.1 M31.1 9.53,46.48 14.61,41.4 M32.1 14.61,33.02 9.53,27.94 M42.1 M43.1 M20.1 11.43,7.62 23.37,7.62 | M50.1 53.47,7.62 45.72,7.62 30.61,7.62 27.56,7.62 | 23.37,7.62 27.56,7.62 | M52.1 27.3,7.49 27.56,7.62 | SJ1.2 23.5,7.75 23.37,7.62 | M41.1 M40.1
  Bottom 0.254: v71.12,43.81 v77.47,43.81 | v34.92,41.27 34.92,46.86 31.62,50.16 M40.1 | v56.64,36.83 58.93,36.83 62.1,40.01 v63.5,40.01
  Bottom 0.61: M41.1 28.57,59.05 13.34,59.05 12.06,60.33 M30.1
X1
  Top 0.254: IC3.1 77.47,36.83 78.11,36.2 Q2.2
X2
  Top 0.254: IC3.2 77.47,38.1 78.11,38.73 Q2.1
XTAL1
  Top 0.254: Q1.1 54.77,15.49 52.45,15.49 51.09,16.86 C1.1 49.34,18.67 48.39,18.67 44.92,22.14 IC1.34
XTAL2
  Top 0.254: Q1.2 51.18,11.9 51.18,14.22 49.82,15.59 C2.1 48.01,17.33 48.01,18.29 44.53,21.77 IC1.33

## Text on the board
tNames: hermesONE | Peter Stegemann | v2.0